# Altium PCB 400005.PcbDoc
Units mm, origin at the board's own origin, x right, y up, seen from the top; angles counter-clockwise.
Board outline 55.78 x 40.28 mm, 2 copper layers (Top Layer, Bottom Layer), stack 1.636 mm thick; 65 components, 72 nets, 277 pads, 196 vias.
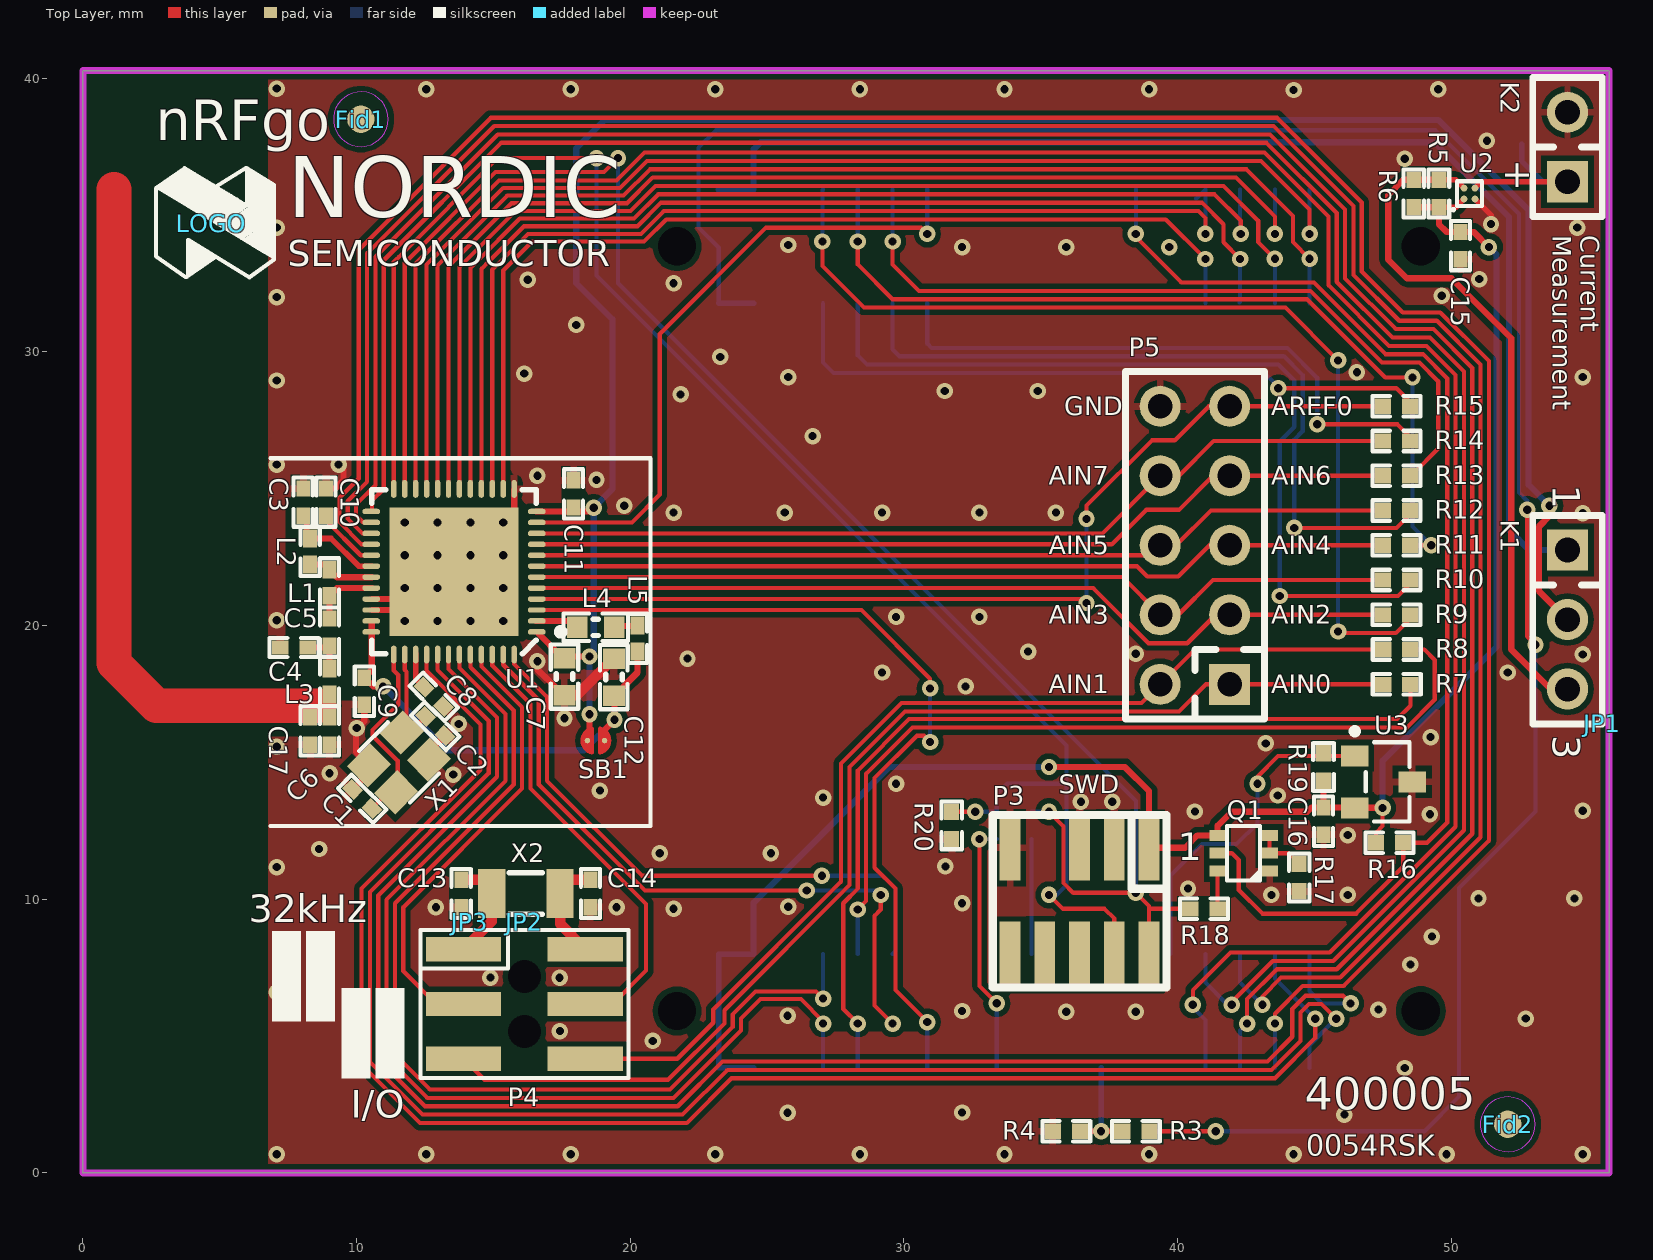
[diagram p0: Top Layer view]
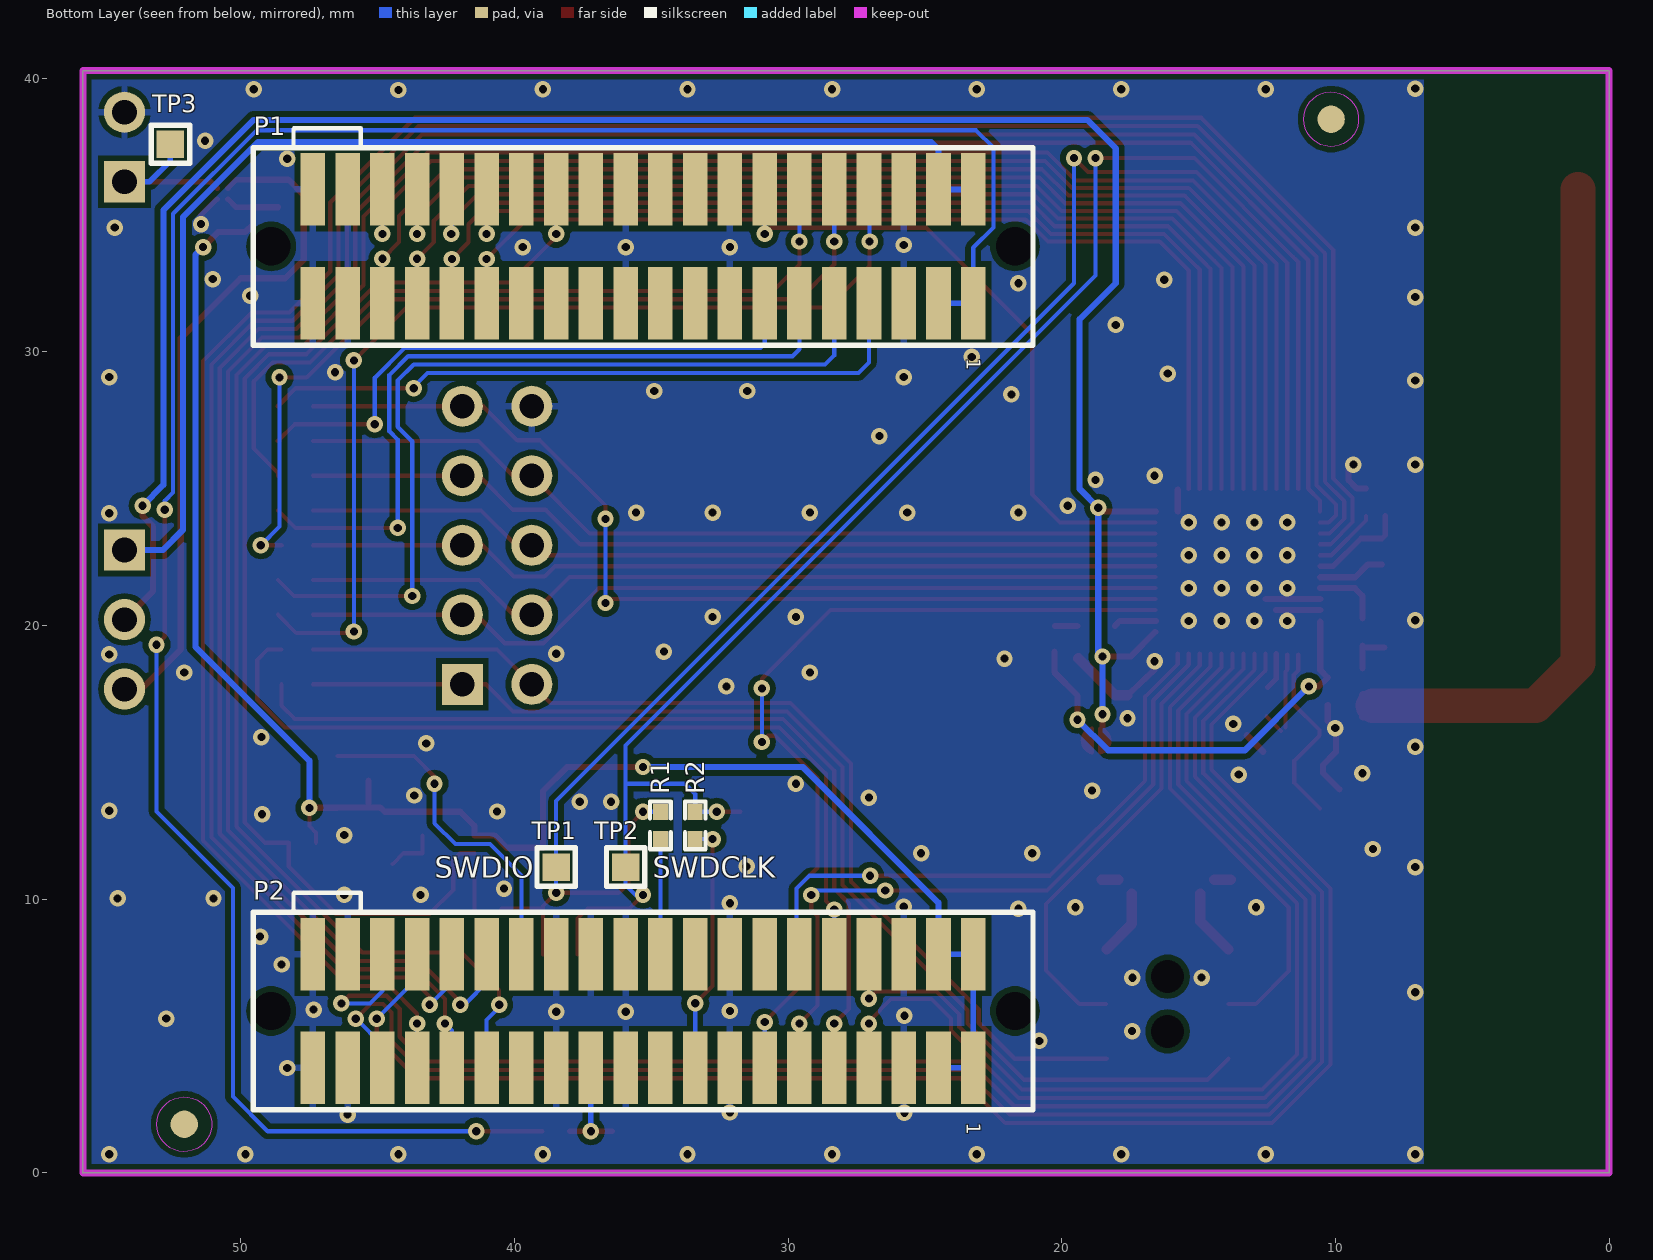
[diagram p1: Bottom Layer view, seen from below]
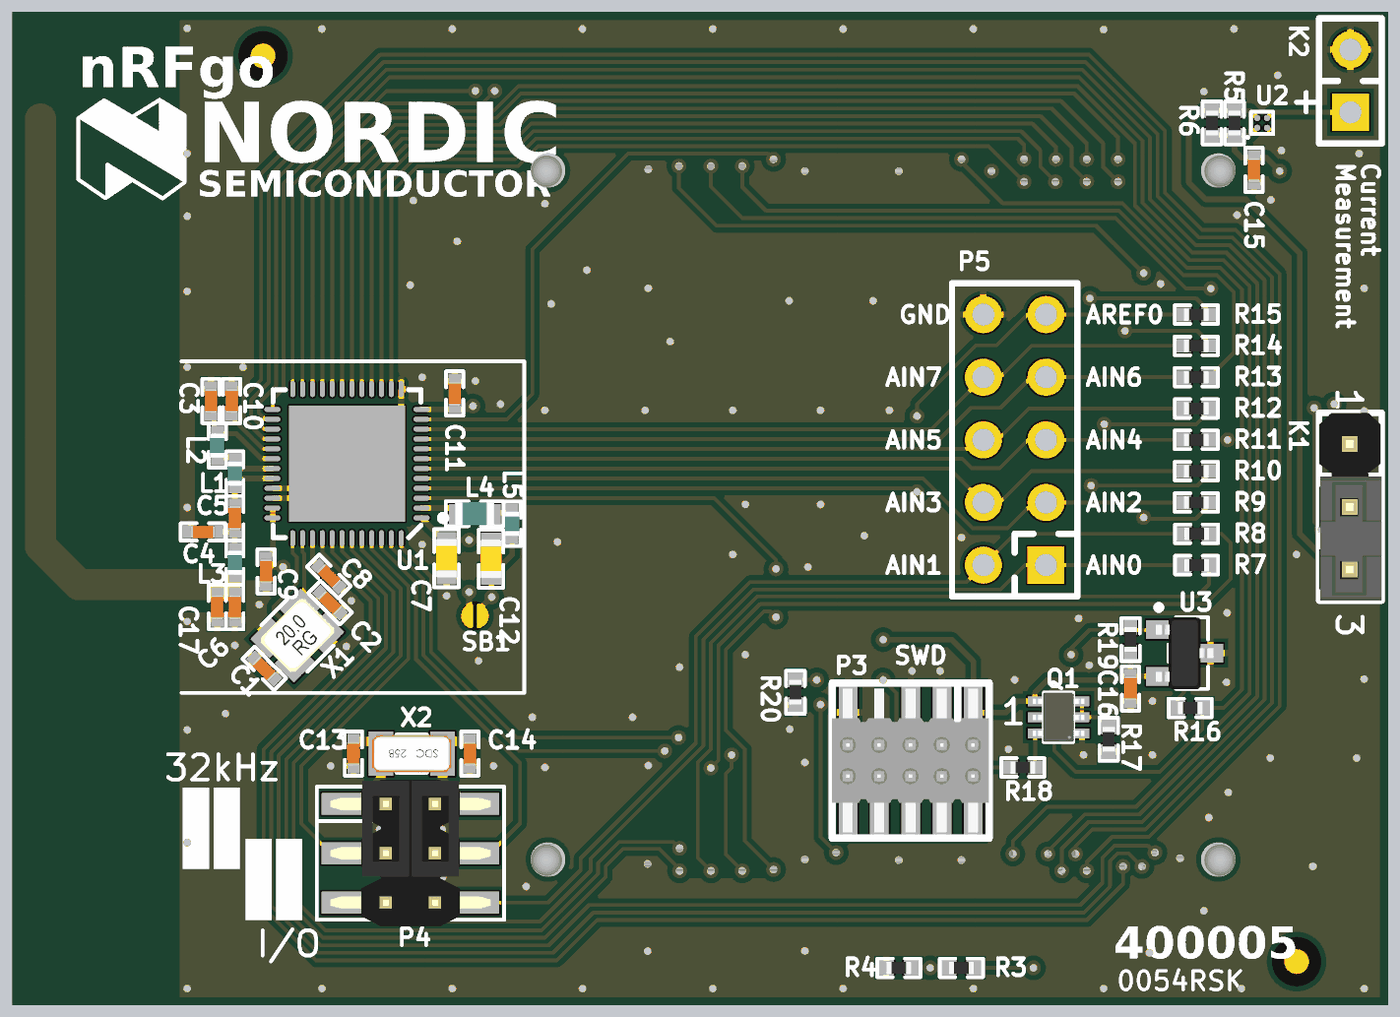
[diagram p2: 3D render of the assembled board from above, using the file's embedded part models]

## Layer stack, top to bottom
Top Layer: signal copper 0.018
Dielectric: core 1.6, FR-4, Dk 4.8
Bottom Layer: signal copper 0.018

## Board outline
0,0 0,40.284 55.778,40.284 55.778,0

## Design rules (kind name [scope] priority, off if disabled: settings)
Clearance Clearance_Poly [(InNamedPolygon('Top Layer')) or (InNamedPolygon('Bottom Layer'))] p1: gap=0.203
Clearance [All] p2: gap=0.127
ComponentClearance [All] p1 off: gap=0.254 collisioncheckmode=3 verticalgap=0.254 showdistances=FALSE
MinimumSolderMaskSliver [All] p1 off: minsoldermaskwidth=0.254
NetAntennae [All] p1 off: netantennaetolerance=0
PolygonConnect PolygonViaConnect [isVia and innet(gnd)] p1: connectstyle=Direct reliefconductorwidth=0.254 reliefentries=4 polygonreliefangle="90 Angle" airgapwidth=0.254
PolygonConnect PolygonConnect_1 [All] p2: connectstyle=Relief reliefconductorwidth=0.254 reliefentries=4 polygonreliefangle="90 Angle" airgapwidth=0.254
RoutingVias [All] p1: holewidth=0.305 width=0.61 viastyle="Through Hole" minholewidth=0.3 minwidth=0.6 maxholewidth=0.711 maxwidth=1.27
SilkToSilkClearance [All] p1 off: silktosilkclearance=0.254
SilkscreenOverComponentPads [All] p1 off: minsilkscreentomaskgap=0.254
SolderMaskExpansion [All] p1: expansion=0.076
Width [All] p1: maxlimit=5.08 minlimit=0.152 preferedwidth=0.152 minimp=50.000000 maximp=50.000000 favimp=50.000000
23 further rules are at their usual default settings.

## Components (designator, comment, footprint, x,y, rotation, side; value= is the part's Value field where it differs from the comment)
C1 "12pF" CAPC1005X04L 10.211,13.665 r135 top
C2 "12pF" CAPC1005X04L 12.878,16.332 r315 top
C3 "2.2nF" CAPC1005X04L 8.052,24.511 r90 top
C4 "0.8pF" CAPC1005X04L 7.722,19.202 r180 top
C5 "2.2pF" CAPC1005X04L 9.017,19.761 r270 top
C6 "1.5pF" CAPC1005X04L 9.017,16.154 r270 top
C7 "4.7µF" CAPC1608X06L 17.602,18.136 r270 top
C8 "100nF" CAPC1005X04L 12.827,17.399 r315 top
C9 "1.0nF" CAPC1005X04L 10.287,17.602 r270 top
C10 "47nF" CAPC1005X04L 8.89,24.511 r90 top
C11 "100nF" CAPC1005X04L 17.932,24.816 r90 top
C12 "1.0µF" CAPC1608X06L 19.406,18.116 r90 top
C13 "12pF" CAPC1005X04L 13.827,10.211 r270 top
C14 "12pF" CAPC1005X04L 18.552,10.211 r270 top
C15 "100nF" CAPC1005X04L 50.343,33.884 r270 top
C16 "100nF" CAPC1005X04L 45.339,12.852 r270 top
C17 "1.5pF" CAPC1005X04L 8.306,16.154 r270 top
Fid1 "Fiducial mark" Fiducial 10.16,38.506 r90 top
Fid2 "Fiducial mark" Fiducial 52.07,1.778 r90 top
JP1 "Shunt 2.54mm" Shunt_2.54mm 55.524,16.411 r90 top
JP2 "Shunt 2.00mm" Shunt_2.00mm 16.139,9.172 r270 top
JP3 "Shunt 2.00mm" Shunt_2.00mm 14.139,9.172 r270 top
K1 "Pin List 1x3" LIST_1x3 54.254,22.761 r270 top
K2 "Pin List 1x2" LIST_1x2 54.254,36.22 r90 top
L1 "4.7nH" INDC1005X04L 9.017,21.565 r270 top
L2 "10nH" INDC1005X04L 8.306,22.708 r270 top
L3 "3.3nH" INDC1005X04L 9.017,17.958 r270 top
L4 "10µH" INDC1608X06L 18.745,19.939 r0 top
L5 "15nH" INDC1005X04L 20.269,19.533 r270 top
LOGO "Nordic Logo M" NORDIC_LOGO_M 4.699,34.706 r0 top
P1 "Samtec SFC-120-T2-L-D-MOD A" "Samtec SFC-120-T2-L-D" 35.306,33.858 r90 top locked
P2 "Samtec SFC-120-T2-L-D-MOD B" "Samtec SFC-120-T2-L-D" 35.306,5.918 r90 top locked
P3 "FTSH-105" HDR_2x5-SMD-1.27mm-SWD 36.424,9.931 r180 top locked
P4 "Pin Header 2x3 SMD" HDR-2x3-SMD-2.0mm 16.139,6.172 r0 top
P5 "Pin Header 2x5" HDR_2x5 40.64,22.936 r90 top
Q1 "FDG6321C" SC70-6 43.368,11.034 r90 top
R1 "N.C." RESC1005X04L 34.671,12.7 r270 bottom
R2 "N.C." RESC1005X04L 33.401,12.7 r270 bottom
R3 "10k" RESC1005X04L 38.481,1.524 r0 top
R4 "82k" RESC1005X04L 35.941,1.524 r0 top
R5 "1R0" RESC1005X04L 49.555,35.789 r270 top
R6 "1R0" RESC1005X04L 48.641,35.789 r270 top
R7 "0R" RESC1005X04L 48.016,17.856 r180 top
R8 "0R" RESC1005X04L 48.016,19.126 r180 top
R9 "0R" RESC1005X04L 48.006,20.396 r0 top
R10 "0R" RESC1005X04L 48.006,21.666 r0 top
R11 "0R" RESC1005X04L 48.006,22.936 r0 top
R12 "0R" RESC1005X04L 48.006,24.206 r0 top
R13 "0R" RESC1005X04L 48.006,25.476 r0 top
R14 "0R" RESC1005X04L 48.006,26.746 r0 top
R15 "0R" RESC1005X04L 48.006,28.016 r0 top
R16 "10k" RESC1005X04L 47.752,12.065 r0 top
R17 "10k" RESC1005X04L 44.45,10.795 r270 top
R18 "150R" RESC1005X04L 40.97,9.652 r0 top
R19 "150k" RESC1005X04L 45.339,14.834 r270 top
R20 "12k" RESC1005X04L 31.75,12.7 r270 top
SB1 "Solderbridge" Solderbridge 18.44,15.799 r0 top
TP1 "SWDIO" TP_SMD_1.0mmX1.0mm 38.481,11.176 r180 bottom
TP2 "SWDCLK" TP_SMD_1.0mmX1.0mm 35.941,11.176 r90 bottom
TP3 "1.0mm,SMD" TP_SMD_1.0mmX1.0mm 52.578,37.592 r270 bottom
U1 "nRF51822-QFAA" QFN40P600X600X90-48N 13.564,21.971 r180 top
U2 "INA216A4" BGA4C40P2X2_76X76X62 50.673,35.789 r90 top
U3 "11AA160" SOT-23a 46.482,15.24 r270 top
X1 "16MHz" BT-XTAL_2520 11.553,15.002 r45 top
X2 "32.768kHz" FC-135 16.19,10.211 r180 top

## Footprints (in the part's own frame and the unit in brackets; to place one, negate y for a bottom-side part, rotate by r counter-clockwise, add the part's x,y. Pads: shape width x height; smd on the part's side, far side on the other; paste and mask are expansions set on the pad)
BGA4C40P2X2_76X76X62 [mm] "BGA, 4-Leads, Body 0.8x0.8mm,  Pitch 0.40mm"
  round 0.25 smd: A1(-0.2,0.2) A2(0.2,0.2) B1(-0.2,-0.2) B2(0.2,-0.2)
  silkscreen extent -0.64,-0.45 0.45,0.64, body extent -0.38,-0.38 0.38,0.38, height 0.63
BT-XTAL_2520 [mm] "TSX-2520"
  rect 1.2x1.1 smd: 1(-0.85,-0.7) 2(0.85,-0.7) 3(0.85,0.7) 4(-0.85,0.7)
  silkscreen extent -1.55,-1.33 1.53,1.32, body extent -1.25,-1 1.27,1, height 0.56
CAPC1005X04L [mm] "Chip Capacitor, 2-Leads, Body 1.0x0.5mm, IPC High Density"
  rect 0.6x0.5 smd: 1(-0.5,0) 2(0.5,0)
  silkscreen extent -0.9,-0.35 0.9,0.35, body extent -0.73,-0.73 0.73,0.73, height 0.5
CAPC1608X06L [mm] "Chip Capacitor, 2-Leads, Body 1.6x0.8mm, IPC High Density"
  rect 0.75x0.8 smd: 1(-0.675,0) 2(0.675,0)
  silkscreen extent -1.17,-0.5 1.17,0.5, body extent -0.8,-0.43 0.8,0.43, height 0.8
FC-135 [mm] "EPSON TOYOCOM - FC-135 32.768KHZ ±20PPM,9.0PF - CRYSTAL, SM, WATCH"
  rect 1x1.8 smd: 1(-1.25,0) 2(1.25,0)
  silkscreen extent -0.6,-0.75 0.6,0.75, body extent -1.6,-0.75 1.6,0.75, height 0.81
Fiducial [mm] "Fiducial Mark"
  round 1 smd paste-10 mask+0.5: 0(0,0)
  round 1 smd far side paste-10 mask+0.5: 0(0,0)
  Keep-Out Layer circle w0.01: c0,0 r1
HDR-2x3-SMD-2.0mm [mm]
  round 1 hole 1.2: 0(0,-1) 0(0,1)
  rect 2.75x0.89 smd: 1(-2.225,2) 2(2.225,2) 3(-2.225,0) 4(2.225,0) 5(-2.225,-2) 6(2.225,-2)
  silkscreen extent -3.8,-2.7 3.8,2.7, body extent -3.25,-2.97 3.25,2.98, height 6.5
HDR_2x5 [mm] "Pin Header, 2.54mm through hole"
  rect 1.5x1.5 hole 0.9: 1(-5.08,-1.27)
  round 1.5 hole 0.9: 2(-5.08,1.27) 3(-2.54,-1.27) 4(-2.54,1.27) 5(0,-1.27) 6(0,1.27) 7(2.54,-1.27) 8(2.54,1.27) 9(5.08,-1.27) 10(5.08,1.27)
  silkscreen extent -6.35,-2.54 6.35,2.54
HDR_2x5-SMD-1.27mm-SWD [mm] "Pin Header, 1.27mm SMD, FTSH-105 series, \"SWD\" version"
  rect 0.76x2.4 smd: 1(-2.54,-1.95) 2(-2.54,1.95) 3(-1.27,-1.95) 4(-1.27,1.95) 5(0,-1.95) 6(0,1.95) 8(1.27,1.95) 9(2.54,-1.95) 10(2.54,1.95)
  silkscreen extent -3.18,-3.15 3.18,3.15, body extent -3.16,-2.92 3.19,2.92, height 4.33
INDC1005X04L [mm] "Chip Inductor, 2-Leads, Body 1.0x0.5mm, IPC High Density"
  rect 0.65x0.5 smd: 1(-0.475,0) 2(0.475,0)
  silkscreen extent -0.9,-0.35 0.9,0.35, body extent -0.5,-0.3 0.5,0.3, height 0.5
INDC1608X06L [mm] "Chip Inductor, 2-Leads, Body 1.6x0.8mm, IPC High Density"
  rect 0.75x0.8 smd: 1(-0.675,0) 2(0.675,0)
  silkscreen extent -1.17,-0.5 1.17,0.5, body extent -0.8,-0.48 0.8,0.47, height 0.8
LIST_1x2 [mm] "Pin List, 2.54mm through hole"
  rect 1.5x1.5 hole 0.9: 1(0,0)
  round 1.5 hole 0.9: 2(2.54,0)
  silkscreen extent -1.27,-1.27 3.81,1.27
LIST_1x3 [mm] "Pin List, 2.54mm through hole"
  rect 1.5x1.5 hole 0.9: 1(0,0)
  round 1.5 hole 0.9: 2(2.54,0) 3(5.08,0)
  silkscreen extent -1.27,-1.27 6.35,1.27, body extent -1.27,-1.27 6.25,1.23, height 8.2
NORDIC_LOGO_M [mm] "Medium Nordic Logo"
  silkscreen extent -2.03,-1.98 2.28,2.02
QFN40P600X600X90-48N [mm] "QFN, 48-Leads, Body 6,0x6,0mm (max), Pitch 0,40mm, IPC Medium Density"
  oval 0.65x0.2 smd: 1(-3.025,2.2) 2(-3.025,1.8) 3(-3.025,1.4) 4(-3.025,1) 5(-3.025,0.6) 6(-3.025,0.2) 7(-3.025,-0.2) 8(-3.025,-0.6) 9(-3.025,-1) 10(-3.025,-1.4) 11(-3.025,-1.8) 12(-3.025,-2.2) 25(3.025,-2.2) 26(3.025,-1.8) 27(3.025,-1.4) 28(3.025,-1) 29(3.025,-0.6) 30(3.025,-0.2) 31(3.025,0.2) 32(3.025,0.6) 33(3.025,1) 34(3.025,1.4) 35(3.025,1.8) 36(3.025,2.2)
  oval 0.2x0.65 smd: 13(-2.2,-3.025) 14(-1.8,-3.025) 15(-1.4,-3.025) 16(-1,-3.025) 17(-0.6,-3.025) 18(-0.2,-3.025) 19(0.2,-3.025) 20(0.6,-3.025) 21(1,-3.025) 22(1.4,-3.025) 23(1.8,-3.025) 24(2.2,-3.025) 37(2.2,3.025) 38(1.8,3.025) 39(1.4,3.025) 40(1,3.025) 41(0.6,3.025) 42(0.2,3.025) 43(-0.2,3.025) 44(-0.6,3.025) 45(-1,3.025) 46(-1.4,3.025) 47(-1.8,3.025) 48(-2.2,3.025)
  rect 4.7x4.7 smd: 49(0,0)
  silkscreen extent -4.03,-3 3,3, body extent -3,-3 3,3, height 0.9
RESC1005X04L [mm] "Chip Resistor, 2-Leads, Body 1.0x0.5mm, IPC High Density"
  rect 0.6x0.55 smd: 1(-0.5,0) 2(0.5,0)
  silkscreen extent -0.87,-0.38 0.88,0.38
"Samtec SFC-120-T2-L-D" [mm] "Samtec SFC series - Female"
  round 0.9 hole 1.4 unplated: 0(0,13.59) 0(0,-13.59)
  rect 2.65x0.9 smd far side: 1(-2.08,12.065) 2(2.08,12.065) 3(-2.08,10.795) 4(2.08,10.795) 5(-2.08,9.525) 6(2.08,9.525) 7(-2.08,8.255) 8(2.08,8.255) 9(-2.08,6.985) 10(2.08,6.985) 11(-2.08,5.715) 12(2.08,5.715) 13(-2.08,4.445) 14(2.08,4.445) 15(-2.08,3.175) 16(2.08,3.175) 17(-2.08,1.905) 18(2.08,1.905) 19(-2.08,0.635) 20(2.08,0.635) 21(-2.08,-0.635) 22(2.08,-0.635) 23(-2.08,-1.905) 24(2.08,-1.905) 25(-2.08,-3.175) 26(2.08,-3.175) 27(-2.08,-4.445) 28(2.08,-4.445) 29(-2.08,-5.715) 30(2.08,-5.715) 31(-2.08,-6.985) 32(2.08,-6.985) 33(-2.08,-8.255) 34(2.08,-8.255) 35(-2.08,-9.525) 36(2.08,-9.525) 37(-2.08,-10.795) 38(2.08,-10.795) 39(-2.08,-12.065) 40(2.08,-12.065)
  body extent -2.12,-14.29 2.13,14.29, height 4.69
SC70-6 [mm] "SC70-6 Industrial Package Dimensions"
  rect 0.4x0.6 smd: 1(0,0) 2(0.65,0) 3(1.3,0) 4(1.3,1.9) 5(0.65,1.9) 6(0,1.9)
  silkscreen extent -0.35,0.35 1.65,1.55, body extent -0.35,-0.1 1.65,2, height 0.92
Shunt_2.00mm [mm]
  body extent 0.05,0.05 3.95,1.95, height 6.04
Shunt_2.54mm [mm]
  body extent 0,0 5.03,2.49, height 7.62
Solderbridge [mm]
  round 0.2 smd paste-10: 1(0,0) 2(0.625,0)
  Top Layer region: 0.236,-0.432 0.16,-0.505 0.042,-0.467 -0.023,-0.424 -0.097,-0.351 -0.15,-0.292 -0.208,-0.193 -0.236,-0.099 -0.231,0.122 -0.206,0.193 -0.122,0.33 -0.038,0.411 0.054,0.469 0.155,0.5 0.206,0.483 0.236,0.43
  Top Layer region: 0.389,0.432 0.465,0.505 0.583,0.467 0.648,0.424 0.721,0.351 0.775,0.292 0.833,0.193 0.861,0.099 0.856,-0.122 0.831,-0.193 0.747,-0.33 0.663,-0.411 0.571,-0.469 0.47,-0.5 0.419,-0.483 0.389,-0.43
  Top Layer lines w0.152: 0.159,-0.431 cw(c0.27,0) 0.159,0.431 ; 0.465,-0.431 ccw(c0.355,0) 0.465,0.431
SOT-23a [mil] "SOT-23 footprint"
  rect 30x40 smd: 1(0,0) 2(74.8,0) 3(37.4,82.68)
  silkscreen extent -39,-4 94,79, body extent -20,-5 95,87, height 39
TP_SMD_1.0mmX1.0mm [mm]
  rect 1x1 smd: 1(0,0)
  silkscreen extent -0.7,-0.7 0.7,0.7

## Part data
C1 C2 C13 C14: library part C0402-12p, "Capacitor, NP0, ±2%"
C3: library part C0402-2n2, "Capacitor, X7R, ±10%"
C4: library part C0402-0.8p, "Capacitor, NP0, ±5%"
C5: library part C0402-2.2p, "Capacitor, NP0, ±0.1pF"
C6 C17: library part C0402-1.5p, "Capacitor, NP0, ±0.1pF"
C7: library part C0603-4µ7, "Capacitor, X5R, ±10%"
C8 C11 C15 C16: library part C0402-100n, "Capacitor, X7R, ±10%"
C9: library part C0402-1n0, "Capacitor, X7R, ±10%"
C10: library part C0402-47n, "Capacitor, X7R, ±10%"
C12: library part C0603-1µ0, "Capacitor, X5R, ±10%"
Fid1 Fid2: library part Fid-Mark, "Fiducial Mark"
JP1: library part "SHUNT JUMPER 2.54mm BLACK GOLD", "SHUNT JUMPER .1\" BLACK GOLD"
JP2 JP3: library part "SHUNT JUMPER 2.00mm BLACK GOLD", "SHUNT JUMPER .079\" BLACK GOLD"
K1: "Pin List 1x3, 2.54mm (100mil)"
K2: "Pin List 1x2, 2.54mm (100mil)"
L1: library part L0402-4n7, "Inductor, 160mA, ±0.1nH"
L2: library part L0402-10n, "Inductor, 100mA, ±2%"
L3: library part L0402-3n3, "Inductor, 190mA, ±0.1nH"
L4: library part L0603-10µ, "Inductor, 80mA, ±10%"
L5: library part L0402-15n, "Inductor, 320mA, ±5%"
LOGO: "Nordic Logo, medium size"
P1 P2: "1.27mm Pitch DIL Vertical SMT Socket Assembly, location pegs, double polarised, gold, 20+20-way"
P3: library part "Samtec Micro Header 10 - SWD", "SAMTEC - FTSH-105-01-L-DV - HEADER, 1.27MM, SMD, 10WAY"
P4: library part "Pin Header 2x3 SMD 2.0mm", "Pin Header 2x3, SMD, 2.0mm"
P5: "Pin Header 2x5, 2.54mm (100mil)"
Q1: "Fairchild, FDG6321C, Dual N & P Channel Digital FET"
R1 R2: library part R0402-N.C., "Not mounted"
R3 R16 R17: library part R0402-10k, "Resistor, ±1%, 0.063W"
R4: library part R0402-82k, "Resistor, ±1%, 0.063W"
R5 R6: library part R0402-1R0, "Resistor, ±1%, 0.063W"
R7 R8 R9 R10 R11 R12 R13 R14 R15: library part R0402-0R, "Resistor, ±5%, 0.063W"
R18: library part R0402-150, "Resistor, ±1%, 0.063W"
R19: library part R0402-150k, "Resistor, ±1%, 0.063W"
R20: library part R0402-12k, "Resistor, ±1%, 0.063W"
TP1 TP2 TP3: library part TP_SMD_1.0MM, "Regular Plated, 1.0mm hole"
U1: library part nRF51822-Q48-6x6_DCDC, "Multi-protocol Bluetooth Low Energy and 2.4GHz proprietary system-on-chip"
U2: "TEXAS INSTRUMENTS - INA216A4YFFT - IC, CURRENT SHUNT MONITOR, 4DSBGA"
U3: library part 11AA160T-I/TT, "MICROCHIP - 11AA160T-I/TT - IC, EEPROM, 16K, 1.8V, UNIO, SOT-23"
X1: library part NX2520SA-16MHZ-STD-CSW-5, "XTAL SMD 2520, 16MHz, 8pF, ±15ppm"
X2: library part "XTAL_FC-135 32.768k", "EPSON TOYOCOM - FC-135 32.768KHZ ±20PPM,9.0PF - CRYSTAL, SM, WATCH"

## Via types
v1: diameter 0.6, hole 0.3, Top Layer to Bottom Layer, tented both sides, 196 vias

## Nets (pads, with @x,y where several pads share a name; then routed paths per layer and width w, separated by ;. In a path a pad name is that pad's centre, name@x,y a point inside that pad or via, vN(x,y) a via of type N, cw(c..) or ccw(c..) an arc to the next point about the centre after c; other vN are vias at no path point)
AIN0: P4.5 P5.1 R7.2 | length 42.6
  Top Layer w0.152: P4.5 14.682,3.404 21.387,3.404 23.444,5.461 23.444,5.944 28.016,10.516 28.016,14.837 30.045,16.866 40.056,16.866 41.046,17.856 R7.2@47.371,17.856
AIN1: P4.6 P5.2 R8.2 | length 38
  Top Layer w0.152: P4.6 21.724,4.172 23.038,5.486 23.038,5.969 27.711,10.643 27.711,14.963 29.918,17.17 38.684,17.17 40.64,19.126 R8.2@47.371,19.126
AIN2: P5.3 R9.1 U1.5 | length 32
  Top Layer w0.152: U1.5 36.922,21.371 38.938,19.355 40.361,19.355 41.402,20.396 R9.1@47.371,20.396
AIN3: P5.4 R10.1 U1.6 | length 31.7
  Top Layer w0.152: U1.6 37.995,21.771 P5.4 ; P5.4@39.573,20.396 40.03,20.396 41.3,21.666 R10.1@47.371,21.666
AIN4: P5.5 R11.1 U1.7 | length 31.4
  Top Layer w0.152: U1.7 38.518,22.171 38.896,21.793 40.03,21.793 41.173,22.936 P5.5 R11.1@47.371,22.936
AIN5: P5.6 R12.1 U1.8 | length 31.5
  Top Layer w0.152: U1.8 39.005,22.571 P5.6 39.954,22.936 41.224,24.206 R12.1@47.371,24.206
AIN6: P5.7 R13.1 U1.9 | length 31.8
  Top Layer w0.152: U1.9 37.601,22.971 38.862,24.232 40.056,24.232 41.3,25.476 R13.1@47.371,25.476
AIN7: P5.8 R14.1 U1.10 | length 32.2
  Top Layer w0.152: U1.10 37.265,23.371 P5.8 40.056,25.476 41.326,26.746 R14.1@47.371,26.746
ANT: C6.1 C17.1 L3.2 | length 26.3
  Top Layer w0.254: C6.1 L3.2
  Top Layer w1.27: 1.137,35.941 1.137,18.628 2.697,17.069 8.636,17.069
ANT1: L1.1 L2.2 U1.31 | length 2.4
  Top Layer w0.229: L2.2 8.824,22.233 9.286,21.771 U1.31@10.564,21.771
ANT2: C5.1 L1.2 U1.32 | length 2.5
  Top Layer w0.229: C5.1 L1.2 9.298,21.371 U1.32@10.566,21.371
AREF0: P5.9 R15.1 U1.4 | length 35.9
  Top Layer w0.152: U1.4 36.535,20.971 v1(36.678,20.828) ; v1(36.678,23.901) 36.678,24.384 39.065,26.772 39.903,26.772 41.148,28.016 P5.9 R15.1@47.371,28.016
  Bottom Layer w0.152: v1(36.678,20.828) v1(36.678,23.901)
AVDD: C9.1 C12.1 L5.2 SB1.2 U1.35 U1.36 | length 16.3
  Top Layer w0.229: U1.35@10.564,20.142 10.564,18.379 C9.1 10.609,17.78 v1(10.973,17.78) ; 18.99,16.12 19.034,16.164 v1(19.431,16.561) 19.431,17.45 20.269,18.288 L5.2
  Bottom Layer w0.229: v1(10.973,17.78) 13.31,15.443 18.313,15.443 v1(19.431,16.561)
BOARDID: P2.23 R3.1 R4.2 | length 3.9
  Top Layer w0.203: R4.2 v1(37.211,1.524) R3.1
  Bottom Layer w0.203: v1(37.211,1.524) P2.23
BOARDID_EE: P2.28 R19.1 U3.1 | length 12.4
  Top Layer w0.152: v1(42.926,14.224) 42.926,14.478 43.68,15.232 45.339,15.232 U3.1@46.474,15.232
  Bottom Layer w0.152: P2.28 39.751,10.871 40.894,12.014 42.164,12.014 42.926,12.776 v1(42.926,14.224)
DEC1: C8.1 U1.39 | length 1.3
  Top Layer w0.203: U1.39@12.164,18.971 12.164,18.062 C8.1
DEC2: C10.1 U1.29 | length 2.4
  Top Layer w0.152: C10.1 8.89,23.837 10.156,22.571 U1.29@10.564,22.571
GND: C1.2 C2.2 C3.2 C4.2 C6.2 C7.2 C8.2 C9.2 C10.2 C11.2 C12.2 C13.2 C14.2 C15.2 C16.2 C17.2 K2.2 P1.5 P1.6 P1.15 P1.16 P1.21 P1.22 P1.37 P1.38 P1.39 P1.40 P2.5 P2.6 P2.15 P2.16 P2.21 P2.22 P2.24 P2.25 P2.26 P2.37 P2.38 P2.39 P2.40 P3.3 P3.5 P3.9 P5.10 Q1.1 R4.1 R17.2 R20.2 U1.13 U1.33 U1.34 U1.49 U2.B1 U3.3 X1.2 X1.4 | length 15.5
  Top Layer w0.203: U2.B1 51.46,35.001 v1(51.46,34.671)
  Top Layer w0.229: C10.2 9.229,25.011 9.525,25.307 9.525,25.705 v1(9.347,25.883) ; C1.2 10.461,14.622 10.461,14.905 9.982,15.384 v1@9.982,16.256 ; v1@9.957,16.256 v1@9.982,16.256 ; C9.2 10.287,16.51 10.033,16.256 v1@9.982,16.256 ; U1.34@10.564,20.571 U1.49@12.164,20.571 ; U1.33@10.564,20.971 U1.49@12.564,20.971 ; U1.49@15.764,24.171 U1.13@15.764,24.971 ; v1(16.612,18.694) 16.622,18.377 C7.2
  Top Layer w0.254: X1.2@12.653,15.4 C2.2
  Top Layer w0.381: C7.2 18.056,17.461 C12.2@19.406,18.811
  other v1: 7.087,0.686 12.548,0.686 17.831,0.686 23.114,0.686 28.397,0.686 33.68,0.686 38.964,0.686 44.247,0.686 49.835,0.686 54.813,0.686 46.101,2.134 25.756,2.202 32.131,2.21 48.311,3.835 20.828,4.826 17.434,5.182 52.73,5.639 25.756,5.74 35.941,5.893 38.481,5.893 32.131,5.918 47.346,5.969 7.087,6.604 14.894,7.137 17.424,7.132 48.514,7.617 49.301,8.636 21.59,9.652 12.903,9.711 19.507,9.711 25.781,9.728 32.131,9.855 51.003,10.033 54.508,10.033 43.434,10.16 46.228,10.16 40.386,10.389 7.087,11.176 31.521,11.201 21.082,11.684 25.146,11.684 8.636,11.836 46.228,12.344 49.225,13.106 40.64,13.208 54.813,13.233 36.474,13.564 37.617,13.564 27.051,13.716 43.663,13.792 18.898,13.973 29.718,14.224 13.538,14.557 9.017,14.605 7.087,15.57 43.231,15.697 49.251,15.926 10.008,16.256 13.741,16.408 17.602,16.612 32.258,17.78 29.21,18.288 52.07,18.288 22.098,18.796 54.813,18.948 38.481,18.974 34.544,19.05 11.764,20.171 12.964,20.171 14.164,20.171 15.364,20.171 7.087,20.193 29.718,20.32 32.766,20.32 11.764,21.371 12.964,21.371 14.164,21.371 15.364,21.371 11.764,22.571 12.964,22.571 14.164,22.571 15.364,22.571 11.764,23.771 12.964,23.771 14.164,23.771 15.364,23.771 54.813,24.105 21.59,24.13 25.654,24.13 29.21,24.13 32.766,24.13 35.56,24.13 19.787,24.384 18.771,25.324 16.612,25.476 7.087,25.883 26.67,26.924 21.844,28.448 31.496,28.575 34.9,28.575 7.087,28.956 25.781,29.083 54.813,29.083 16.129,29.21 46.558,29.261 23.292,29.82 18.034,30.988 7.087,32.004 49.657,32.055 21.59,32.512 16.256,32.639 51.029,32.664 32.131,33.833 35.941,33.833 39.7,33.833 25.781,33.909 7.087,34.544 54.61,34.544 48.311,37.059 51.308,37.719 44.247,39.573 12.548,39.599 17.831,39.599 23.114,39.599 28.397,39.599 33.68,39.599 38.964,39.599 49.53,39.599 7.087,39.624
NetC4_1: C4.1 C5.2 L3.1 | length 1.6
  Top Layer w0.229: C4.1 C5.2@8.958,19.202 ; L3.1 C5.2
NetC13_1: C13.1 P4.1 X2.2 | length 3.1
  Top Layer w0.381: C13.1 X2.2@14.44,10.711 ; P4.1 14.94,9.198 X2.2
NetC14_1: C14.1 P4.2 X2.1 | length 3
  Top Layer w0.381: X2.1 17.44,9.096 P4.2 ; X2.1@17.94,10.711 C14.1
NetK1_3: K1.3 R5.1 R6.1 U2.A2 | length 25.2
  Top Layer w0.203: R5.1 50.173,36.289 U2.A2
  Top Layer w0.229: R5.1 48.26,36.289 47.701,35.73 47.701,33.376 48.387,32.69 50.013,32.69 52.197,30.505 52.197,19.126 53.642,17.681 K1.3
NetK2_1: K2.1 TP3.1 U2.B2 | length 6.1
  Top Layer w0.203: U2.B2 51.105,36.22 K2.1
  Bottom Layer w0.203: TP3.1 52.578,36.982 53.34,36.22 K2.1
NetL4_1: L4.1 U1.2 | length 1.6
  Top Layer w0.229: U1.2@16.564,20.171 17.878,20.171 L4.1@18.059,19.99
NetL4_2: L4.2 L5.1 | length 0.8
  Top Layer w0.229: L4.2@19.439,19.982 L5.1@20.243,19.982
NetQ1_2: Q1.2 Q1.3 R17.1 | length 1.9
  Top Layer w0.152: Q1.3 Q1.2 44.061,11.684 R17.1
NetQ1_6: Q1.6 R18.2 | length 1.4
  Top Layer w0.152: R18.2@41.468,9.652 Q1.6
NRF_RST: P1.26 Q1.5 R16.2 | length 43.3
  Top Layer w0.152: v1(38.481,34.313) 38.481,34.196 40.142,32.535 44.991,32.535 47.608,29.918 48.974,29.918 49.86,29.032 49.86,12.802 49.124,12.065 R16.2 48.252,11.193 46.533,9.474 43.104,9.474 42.24,10.338 42.24,11.43 41.986,11.684 Q1.5
  Bottom Layer w0.152: v1(38.481,34.313) P1.26
P0.00: P1.7 R15.2 | length 24.5
  Top Layer w0.152: v1(43.688,28.677) 47.996,28.677 R15.2@48.656,28.016
  Bottom Layer w0.152: P1.7 27.051,29.616 27.432,29.235 43.18,29.235 v1@43.785,28.63
P0.01: P1.8 R9.2 | length 36.1
  Top Layer w0.152: v1(27.026,34.036) 27.026,33.144 28.55,31.62 43.945,31.62 v1(45.872,29.693) ; v1(45.872,19.787) 45.923,19.736 47.981,19.736 R9.2@48.641,20.396
  Bottom Layer w0.152: v1(27.026,34.036) 27.026,35.913 P1.8 ; v1@45.872,29.718 v1(45.872,19.787) v1@45.923,19.736
P0.02: P1.9 R10.2 | length 31.5
  Top Layer w0.152: v1(43.739,21.082) 48.057,21.082 R10.2@48.641,21.666
  Bottom Layer w0.152: P1.9 28.321,29.87 28.651,29.54 43.685,29.54 44.272,28.953 44.272,27.268 43.739,26.735 v1(43.739,21.082)
P0.03: P1.10 R11.2 | length 31.9
  Top Layer w0.152: v1(28.321,34.036) 28.321,33.195 29.591,31.925 44.739,31.925 47.594,29.07 v1@48.565,29.07 ; R11.2 v1(49.273,22.936)
  Bottom Layer w0.152: v1(28.321,34.036) P1.10 ; v1(48.59,29.07) 48.59,23.619 v1(49.273,22.936)
P0.04: P1.11 R12.2 | length 27.4
  Top Layer w0.152: v1(44.272,23.571) 48.006,23.571 R12.2@48.641,24.206
  Bottom Layer w0.152: P1.11 29.591,30.099 29.845,29.845 43.888,29.845 44.577,29.156 44.577,27.102 44.272,26.797 v1(44.272,23.571)
P0.05: P1.12 R13.2 | length 28.3
  Top Layer w0.152: v1(29.591,34.036) 29.591,33.195 30.556,32.23 44.865,32.23 47.481,29.614 48.844,29.614 49.53,28.928 49.53,26.467 48.641,25.578 R13.2@48.641,25.476
  Bottom Layer w0.152: v1(29.591,34.036) P1.12
P0.06: P1.13 R14.2 | length 21.8
  Top Layer w0.152: v1(45.11,27.356) 48.046,27.356 R14.2@48.656,26.746 ; R14.2@48.59,26.746 R14.2@48.641,26.746
  Bottom Layer w0.152: P1.13 30.861,30.302 31.013,30.15 44.015,30.15 45.11,29.055 v1(45.11,27.356)
P0.07: P1.14 U1.11 | length 23.9
  Top Layer w0.152: U1.11 20.066,23.771 21.082,24.787 21.082,30.658 24.965,34.541 30.632,34.541 v1(30.861,34.313)
  Bottom Layer w0.152: v1(30.861,34.313) P1.14
P0.08: P1.29 U1.14 | length 36.9
  Top Layer w0.152: U1.14 15.364,32.976 15.736,33.349 ; 15.567,33.179 16.423,34.036 20.512,34.036 21.322,34.846 39.573,34.846 v1(41.021,33.398)
  Bottom Layer w0.152: P1.29 v1(41.021,33.398)
P0.09: P1.30 U1.15 | length 37.7
  Top Layer w0.152: U1.15@14.961,24.996 14.961,33.004 15.167,33.211 16.272,34.315 20.396,34.315 21.232,35.151 40.767,35.151 41.021,34.897 v1(41.021,34.313)
  Bottom Layer w0.152: P1.30@40.691,35.608 P1.30 v1@41.021,34.366
P0.10: P1.31 U1.16 | length 39.7
  Top Layer w0.152: U1.16 14.564,33.038 14.848,33.323 ; 14.767,33.242 16.12,34.595 20.269,34.595 21.13,35.456 40.893,35.456 41.681,34.667 41.681,34.008 v1(42.291,33.398)
  Bottom Layer w0.152: P1.31@42.266,31.804 42.291,31.829 v1(42.291,33.398)
P0.11: P1.32 U1.17 | length 40
  Top Layer w0.152: U1.17 14.164,33.069 14.435,33.341 ; 14.367,33.273 15.968,34.874 20.142,34.874 21.028,35.76 41.351,35.76 42.316,34.795 v1(42.316,34.313)
  Bottom Layer w0.152: P1.32 42.291,34.338 v1(42.316,34.313)
P0.12: P1.33 U1.18 | length 42.4
  Top Layer w0.152: U1.18 13.764,33.1 14.042,33.379 ; 13.967,33.304 15.817,35.154 20.015,35.154 20.927,36.065 41.681,36.065 42.951,34.795 42.951,34.013 v1(43.561,33.404)
  Bottom Layer w0.152: P1.33 v1(43.561,33.404)
P0.13: P1.34 U1.19 | length 42.5
  Top Layer w0.152: U1.19 13.364,33.132 13.567,33.335 15.665,35.433 19.888,35.433 20.825,36.37 42.139,36.37 43.561,34.948 v1(43.561,34.313)
  Bottom Layer w0.152: v1(43.561,34.313) P1.34
P0.14: P1.35 U1.20 | length 45
  Top Layer w0.152: U1.20 12.964,33.163 13.199,33.398 ; 13.167,33.366 15.513,35.712 19.761,35.712 20.724,36.675 42.52,36.675 44.221,34.973 44.221,34.013 v1(44.831,33.404)
  Bottom Layer w0.152: P1.35 44.831,33.325 v1@44.856,33.35
P0.15: P1.36 U1.21 | length 45.6
  Top Layer w0.152: U1.21 12.564,33.194 12.99,33.62 ; 12.767,33.397 15.362,35.992 19.634,35.992 20.622,36.98 43.053,36.98 44.831,35.202 v1(44.831,34.313)
  Bottom Layer w0.152: v1(44.831,34.313) P1.36
P0.16: P2.29 U1.22 | length 84.5
  Top Layer w0.152: U1.22 12.164,33.225 15.21,36.271 19.507,36.271 20.52,37.284 43.181,37.284 45.517,34.948 45.517,32.44 47.734,30.223 49.103,30.223 50.165,29.161 50.165,12.649 45.568,8.052 41.938,8.052 40.564,6.677 v1(40.564,6.144)
  Bottom Layer w0.152: v1@40.386,6.22 41.021,5.585 P2.29
P0.17: P2.30 U1.25 | length 85.6
  Top Layer w0.152: U1.25@10.564,24.171 10.564,24.567 10.998,25.002 10.998,33.352 15.289,37.643 43.256,37.643 45.822,35.077 45.822,32.563 47.854,30.531 49.225,30.531 50.47,29.286 50.47,12.522 45.695,7.747 43.485,7.747 41.986,6.248 v1(41.986,6.144)
  Bottom Layer w0.152: P2.30 41.021,6.957 v1@41.758,6.22
P0.18: P2.31 U1.26 | length 87.7
  Top Layer w0.152: U1.26@10.564,23.771 10.249,23.771 9.985,24.035 9.985,24.42 10.693,25.128 10.693,33.479 15.162,37.948 43.383,37.948 46.126,35.204 46.126,32.69 47.981,30.836 49.352,30.836 50.775,29.413 50.775,12.395 45.822,7.442 43.637,7.442 42.545,6.35 v1(42.545,5.458)
  Bottom Layer w0.152: P2.31 42.291,5.204 v1(42.545,5.458)
P0.19: P2.32 U1.27 | length 89.1
  Top Layer w0.152: U1.27@10.564,23.371 10.218,23.371 9.68,23.909 9.68,24.546 10.389,25.255 10.389,33.605 15.036,38.252 43.51,38.252 46.431,35.331 46.431,32.817 48.108,31.14 49.479,31.14 51.079,29.54 51.079,12.268 45.949,7.137 43.79,7.137 43.104,6.452 v1(43.104,6.144)
  Bottom Layer w0.152: P2.32 42.291,6.957 v1(43.104,6.144) ; v1@42.951,6.144 v1@42.951,6.299
P0.20: P2.33 U1.28 | length 90.2
  Top Layer w0.152: U1.28@10.564,22.971 10.187,22.971 9.375,23.782 9.375,24.672 10.084,25.381 10.084,33.731 14.91,38.557 43.637,38.557 46.736,35.458 46.736,32.944 48.235,31.445 49.606,31.445 51.384,29.667 51.384,12.141 46.076,6.833 44.577,6.833 43.561,5.817 v1(43.561,5.461)
  Bottom Layer w0.152: P2.33 v1(43.561,5.461)
P0.21: P2.34 U1.40 | length 58.3
  Top Layer w0.152: U1.40@12.564,18.971 12.564,18.353 14.529,16.388 14.529,14.735 10.185,10.391 10.185,3.962 12.319,1.829 22.073,1.829 23.704,3.46 43.57,3.46 45.034,4.925 v1(45.034,5.636)
  Bottom Layer w0.152: P2.34 43.561,7.109 v1(45.034,5.636)
P0.22: P2.35 U1.41 | length 58.3
  Top Layer w0.152: U1.41@12.964,18.971 12.964,18.384 14.834,16.514 14.834,14.608 10.49,10.264 10.49,4.053 12.409,2.134 21.92,2.134 23.552,3.765 43.44,3.765 44.501,4.826 44.501,5.865 44.806,6.169 45.267,6.169 v1(45.801,5.636)
  Bottom Layer w0.152: P2.35 44.831,4.666 v1(45.801,5.636)
P0.23: P2.36 U1.42 | length 59
  Top Layer w0.152: U1.42@13.364,18.971 13.364,18.416 15.138,16.641 15.138,14.478 10.795,10.135 10.795,4.143 12.5,2.438 21.742,2.438 23.374,4.07 43.29,4.07 44.196,4.976 44.196,5.992 44.679,6.474 46.05,6.474 v1(46.33,6.195)
  Bottom Layer w0.152: P2.36 44.831,6.652 45.288,6.195 v1(46.33,6.195)
P0.24: P2.7 U1.43 | length 37.5
  Top Layer w0.152: U1.43@13.764,18.971 13.764,18.447 15.443,16.767 15.443,14.328 11.1,9.985 11.1,4.233 12.59,2.743 21.59,2.743 24.054,5.207 24.054,5.639 24.765,6.35 26.241,6.35 v1@27.051,5.54
  Bottom Layer w0.152: P2.7 v1(27.051,5.458)
P0.25: P2.8 U1.44 | length 36.8
  Top Layer w0.152: U1.44@14.164,18.971 14.164,18.478 15.748,16.893 15.748,14.199 11.405,9.855 11.405,4.324 12.68,3.048 21.463,3.048 23.749,5.334 23.749,5.791 24.587,6.629 26.794,6.629 v1(27.051,6.373)
  Bottom Layer w0.152: v1(27.051,6.373) P2.8
P0.26: P2.9 R7.1 | length 33.3
  Top Layer w0.152: v1(28.321,5.458) 27.788,5.992 27.788,9.855 28.321,10.389 28.321,14.711 30.196,16.586 48.031,16.586 48.516,17.071 R7.1
  Bottom Layer w0.152: P2.9 v1(28.321,5.458)
P0.27: P2.10 R8.1 | length 31.1
  Top Layer w0.152: v1(28.321,9.627) 28.626,9.931 28.626,14.585 30.323,16.281 48.387,16.281 49.403,17.297 49.403,18.745 49.022,19.126 R8.1
  Bottom Layer w0.152: P2.10 v1(28.321,9.627)
P0.28: P2.11 U1.47 | length 24.5
  Top Layer w0.152: U1.47@15.364,18.971 15.364,18.571 16.662,17.272 16.662,14.199 20.541,10.32 v1(26.451,10.32) ; v1(29.159,10.157) 29.159,9.624 28.931,9.395 28.931,6.119 v1(29.591,5.458)
  Bottom Layer w0.152: v1(26.451,10.32) 28.996,10.32 v1@29.156,10.16
P0.29: P2.12 U1.48 | length 21.9
  Top Layer w0.152: U1.48@15.764,18.971 15.764,18.602 16.967,17.398 16.967,14.328 20.434,10.862 v1(27.01,10.862)
  Bottom Layer w0.152: v1(27.01,10.862) 29.219,10.862 29.693,10.389 29.693,8.1 P2.12
P0.30: P2.13 U1.3 | length 31.9
  Top Layer w0.152: U1.3 28.451,20.571 30.963,18.059 v1(30.963,17.704) ; v1(30.861,5.512) 29.693,6.68 29.693,10.389 28.931,11.151 28.931,14.427 30.48,15.977 30.734,15.977 v1(30.963,15.748)
  Bottom Layer w0.152: P2.13 v1(30.861,5.512) ; v1(30.963,15.748) v1(30.963,17.704)
SWDCLK: P3.4 R2.1 R20.1 TP2.1 U1.24 | length 60.9
  Top Layer w0.152: U1.24 11.364,33.287 11.661,33.584 ; 11.567,33.49 15.161,37.084 v1(18.771,37.084) ; R20.1 v1(32.614,13.2) ; v1(35.306,10.16) 35.814,9.652 37.338,9.652 37.694,9.296 P3.4
  Bottom Layer w0.152: v1(18.771,37.084) 18.771,32.791 35.941,15.621 35.941,14.224 ; v1(32.614,13.2) R2.1 33.401,13.843 33.782,14.224 35.941,14.224 ; v1(35.306,10.16) 35.585,10.16 35.941,10.516 TP2.1 35.941,14.224
SWDCLK': P2.17 R2.2 | length 9.3
  Top Layer w0.152: v1(32.766,12.2) 32.766,6.833 v1(33.401,6.198)
  Bottom Layer w0.152: v1(32.766,12.2) R2.2 ; P2.17 v1(33.401,6.198)
SWDIO: P3.2 R1.1 R18.1 TP1.1 U1.23 | length 62.5
  Top Layer w0.152: U1.23 11.764,33.256 15.084,36.576 19.05,36.576 v1(19.558,37.084) ; v1(35.306,13.2) 35.84,12.666 35.84,10.591 36.195,10.236 v1(38.481,10.236) 38.964,9.754 38.964,9.652 ; P3.2 38.964,9.652 ; R18.1 38.964,9.652
  Bottom Layer w0.152: v1(19.558,37.084) 19.558,32.512 38.481,13.589 TP1.1 v1(38.481,10.236) ; R1.1 v1(35.306,13.2)
SWDIO': P2.20 R1.2 | length 4.2
  Bottom Layer w0.152: P2.20 R1.2
VCC: P1.1 P1.3 R3.2 | length 84.3
  Top Layer w0.152: R3.2 v1(41.402,1.524) ; v1(52.781,24.232) 52.781,19.609 v1(53.086,19.304)
  Bottom Layer w0.152: P1.1 23.241,33.807 22.504,34.544 22.504,37.465 23.139,38.1 49.428,38.1 52.476,35.052 52.476,24.867 52.781,24.562 v1(52.781,24.232) ; v1(41.402,1.524) 49.022,1.524 50.292,2.794 50.292,10.414 53.086,13.208 v1(53.086,19.304)
  Bottom Layer w0.203: P1.1 P1.3
VCC_NRF: C7.1 C11.1 K1.2 SB1.1 U1.1 U1.12 | length 79.1
  Top Layer w0.229: U1.12@16.564,24.171 v1@18.634,24.171 ; U1.1 17.487,18.872 v1(18.517,18.872) ; 18.517,16.075 v1(18.517,16.764) ; v1(53.594,24.384) 53.594,24.003 53.213,23.622 53.213,21.263 K1.2
  Bottom Layer w0.229: v1(18.517,16.764) v1(18.517,18.872) 18.669,19.025 v1@18.669,24.282 ; v1(18.669,24.308) 19.355,24.994 19.355,31.191 18.034,32.512 18.034,37.44 19.075,38.481 49.53,38.481 52.832,35.179 52.832,25.146 v1(53.594,24.384)
VCC_NRF': K1.1 P1.2 P1.4 | length 45.5
  Bottom Layer w0.229: P1.2 P1.4 24.511,37.408 24.771,37.668 49.378,37.668 52.121,34.925 52.121,23.495 52.855,22.761 K1.1
VDD_PA: C3.1 L2.1 U1.30 | length 3.6
  Top Layer w0.203: C3.1@8.179,24.011 8.179,23.31 L2.1 9.077,23.183 10.089,22.171 U1.30@10.564,22.171
VTG: C15.1 C16.1 P2.1 P2.2 P2.3 P2.4 P3.1 Q1.4 R5.2 R6.2 R16.1 R19.2 U2.A1 U3.2 | length 66.3
  Top Layer w0.152: R16.1 47.252,12.429 47.498,12.675 v1(47.498,13.34)
  Top Layer w0.203: R5.2 50.173,35.289 U2.A1
  Top Layer w0.229: v1(35.306,14.834) 38.075,14.834 38.964,13.945 P3.1 40.279,11.881 40.731,12.334 Q1.4 41.468,12.69 41.978,13.2 44.747,13.2 44.899,13.352 C16.1 ; R19.2 C16.1 ; U3.2@46.47,13.352 C16.1 ; U3.2 v1(47.498,13.34) ; R6.2 R5.2 49.555,34.663 49.835,34.384 C15.1 50.833,34.384 v1(51.384,33.833)
  Bottom Layer w0.203: P2.3 P2.1 P2.2 P2.4
  Bottom Layer w0.229: P2.4 24.511,9.881 29.464,14.834 35.204,14.834 v1@35.306,14.732 ; v1(47.498,13.34) 47.498,15.062 51.664,19.228 51.664,33.553 v1(51.384,33.833)
XC1: C1.1 U1.37 X1.1 | length 6.9
  Top Layer w0.152: C1.1 11.506,14.253 11.506,15.062 10.592,15.977 10.592,16.18 11.529,17.117 11.529,18.19 11.364,18.355 U1.37
XC2: C2.1 U1.38 X1.3 | length 3.4
  Top Layer w0.152: U1.38 11.764,18.386 11.833,18.316 X1.3@11.833,16.278 ; X1.3@11.993,16.154 C2.1
XL1: P4.3 U1.45 | length 16.7
  Top Layer w0.152: P4.3 12.913,6.172 11.709,7.376 11.709,9.706 16.053,14.049 16.053,17.019 14.564,18.509 U1.45@14.564,18.971
XL2: P4.4 U1.46 | length 16.6
  Top Layer w0.152: U1.46@14.964,18.971 14.964,18.54 16.358,17.146 16.358,14.049 20.584,9.823 20.584,7.391 19.365,6.172 P4.4@18.39,6.172
pads on no net: Fid1.0 Fid2.0 P1.0 P1.17 P1.18 P1.19 P1.20 P1.23 P1.24 P1.25 P1.27 P1.28 P2.0 P2.14 P2.18 P2.19 P2.27 P3.6 P3.8 P3.10 P4.0

## Polygon pours and split planes (outlines as drawn)
GND on Top Layer "Top Layer" (solid, remove dead copper, pour order 4): 55.778,0 6.782,0 6.782,40.64 55.778,40.64
GND on Bottom Layer "Bottom Layer" (solid, remove dead copper, pour order 6): 6.35,0 6.35,40.284 55.778,40.284 55.778,0

## Keep-outs
Keep-Out Layer:
  the board outline again, w0.254

## Other copper
Top Layer:
  pour cut-out: 6.706,18.964 10.262,18.964 10.262,17.363 6.706,17.363
  pour cut-out: 6.731,17.541 9.017,17.541 9.017,15.941 6.731,15.941
  pour cut-out: 7.391,24.689 9.982,24.689 9.982,18.161 7.391,18.161
  pour cut-out: 6.782,-0.762 6.782,40.64 0,40.64 0,-0.762
  pour cut-out: 8.661,18.847 10.389,18.847 10.389,17.247 8.661,17.247
  pour cut-out: 50.165,36.297 51.181,36.297 51.181,35.281 50.165,35.281
  pour cut-out: 12.203,17.363 12.878,18.039 13.435,17.482 12.76,16.806
  pour cut-out: 11.074,24.511 16.053,24.511 16.053,19.482 11.075,19.482
  pour cut-out: 47.212,25.566 48.94,25.566 48.94,23.965 47.212,23.965
  pour cut-out: 47.223,23.009 48.95,23.009 48.95,21.409 47.223,21.409
  pour cut-out: 45.415,15.024 47.142,15.024 47.142,13.424 45.415,13.424
  pour cut-out: 27.007,5.45 31.159,5.45 31.159,5.154 27.007,5.154
  pour cut-out: 33.376,9.322 39.472,9.322 39.472,6.553 33.376,6.553
Bottom Layer:
  pour cut-out: 6.782,-1.016 6.782,40.386 0,40.386 0,-1.016

## Silkscreen, mask and mechanical layers (free items; w line width, h text height)
Top Overlay:
  rectangle: 6.906,5.539 7.973,8.841
  rectangle: 8.151,5.539 9.218,8.841
  rectangle: 10.691,3.456 11.758,6.758
  rectangle: 9.446,3.456 10.513,6.758
  lines w0.152: 6.857,12.679 20.751,12.679 20.751,26.116 6.857,26.116
  text "nRFgo" at 2.667,37.246 h2.54
  text "+" at 52.857,35.865 h1.02 r90
  text "Measurement" at 53.721,34.265 h0.69 r270
  text "Current" at 54.737,34.265 h0.69 r270
  text "NORDIC" at 7.493,34.198 h3.81
  text "SEMICONDUCTOR" at 7.493,32.801 h1.65
  text "GND" at 35.865,27.686 h0.69
  text "AREF0" at 43.434,27.686 h0.69
  text "AIN7" at 35.306,25.146 h0.69
  text "AIN6" at 43.434,25.146 h0.69
  text "1" at 53.721,25.146 h1.02 r270
  text "AIN5" at 35.306,22.606 h0.69
  text "AIN4" at 43.434,22.606 h0.69
  text "AIN3" at 35.306,20.066 h0.69
  text "AIN2" at 43.434,20.066 h0.69
  text "AIN1" at 35.306,17.526 h0.69
  text "AIN0" at 43.434,17.526 h0.69
  text "3" at 53.721,16.002 h1.02 r270
  text "SWD" at 35.662,13.868 h0.69
  text "32kHz" at 6.07,9.158 h1.02
  text "I/O" at 9.8,2.021 h1.02
  text "400005" at 44.653,1.905 h2.03
  text "0054RSK" at 44.704,0.635 h0.76
Mechanical 1:
  the board outline again, w0.254
Mechanical 3:
  lines w0.152: 0.356,35.535 2.388,35.535 ; 0.356,36.576 2.388,36.576
  text "old - new" at 2.413,32.868 h0.76 r90

## Text inside footprints (layer, text, board x,y; h text height)
P1: Bottom Overlay "1" at 23.47,29.769 h0.51 r90
P2: Bottom Overlay "1" at 23.47,1.829 h0.51 r90
P3: Top Overlay "1" at 40.005,11.43 h1.02